# Altium PCB PCB1.PcbDoc
Units mm, origin at the board's own origin, x right, y up, seen from the top; angles counter-clockwise.
Board outline 40 x 50 mm, 4 copper layers (TopLayer1, MidLayer2, Ground Plane, BottomLayer4), stack 1.58 mm thick; 97 components, 38 nets, 264 pads, 122 vias.
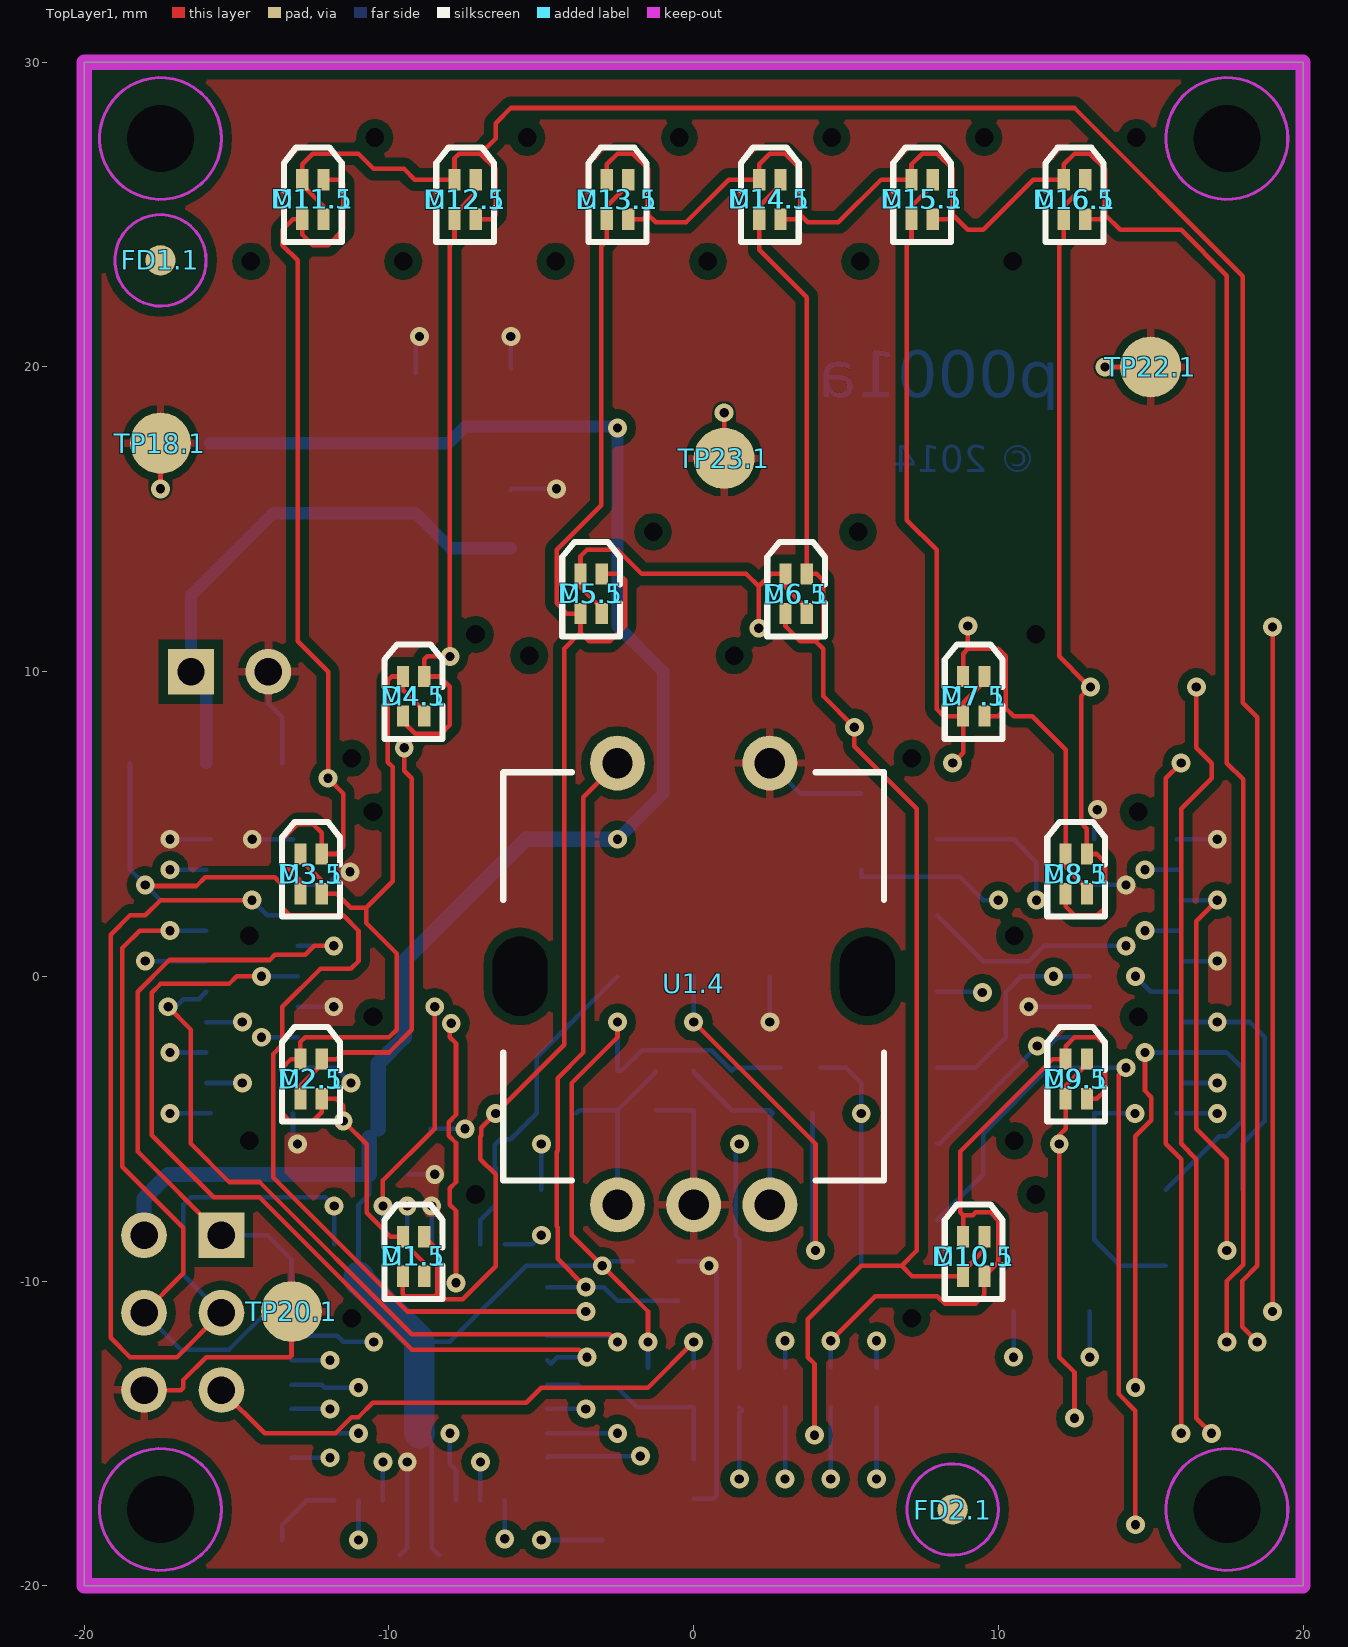
[diagram p0: TopLayer1 view]
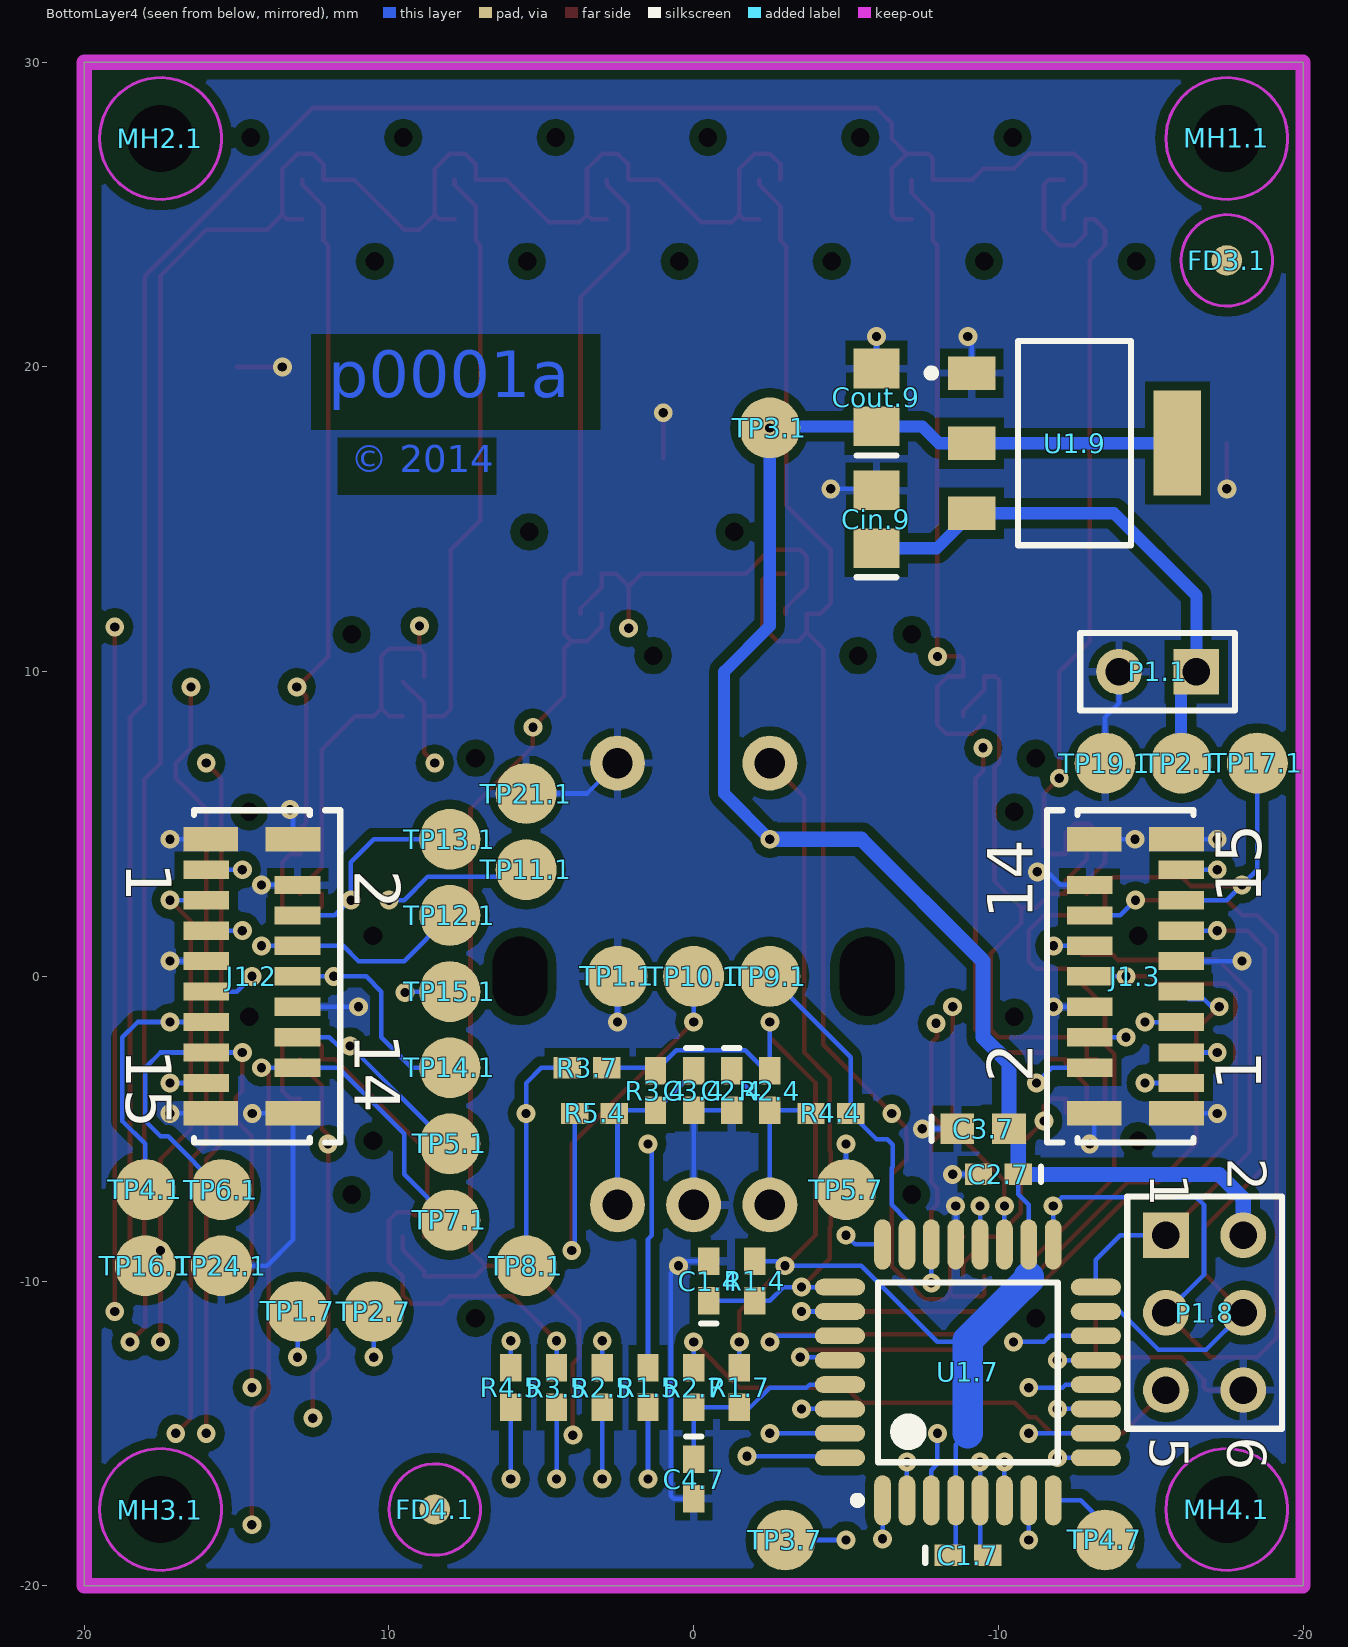
[diagram p1: BottomLayer4 view, seen from below]
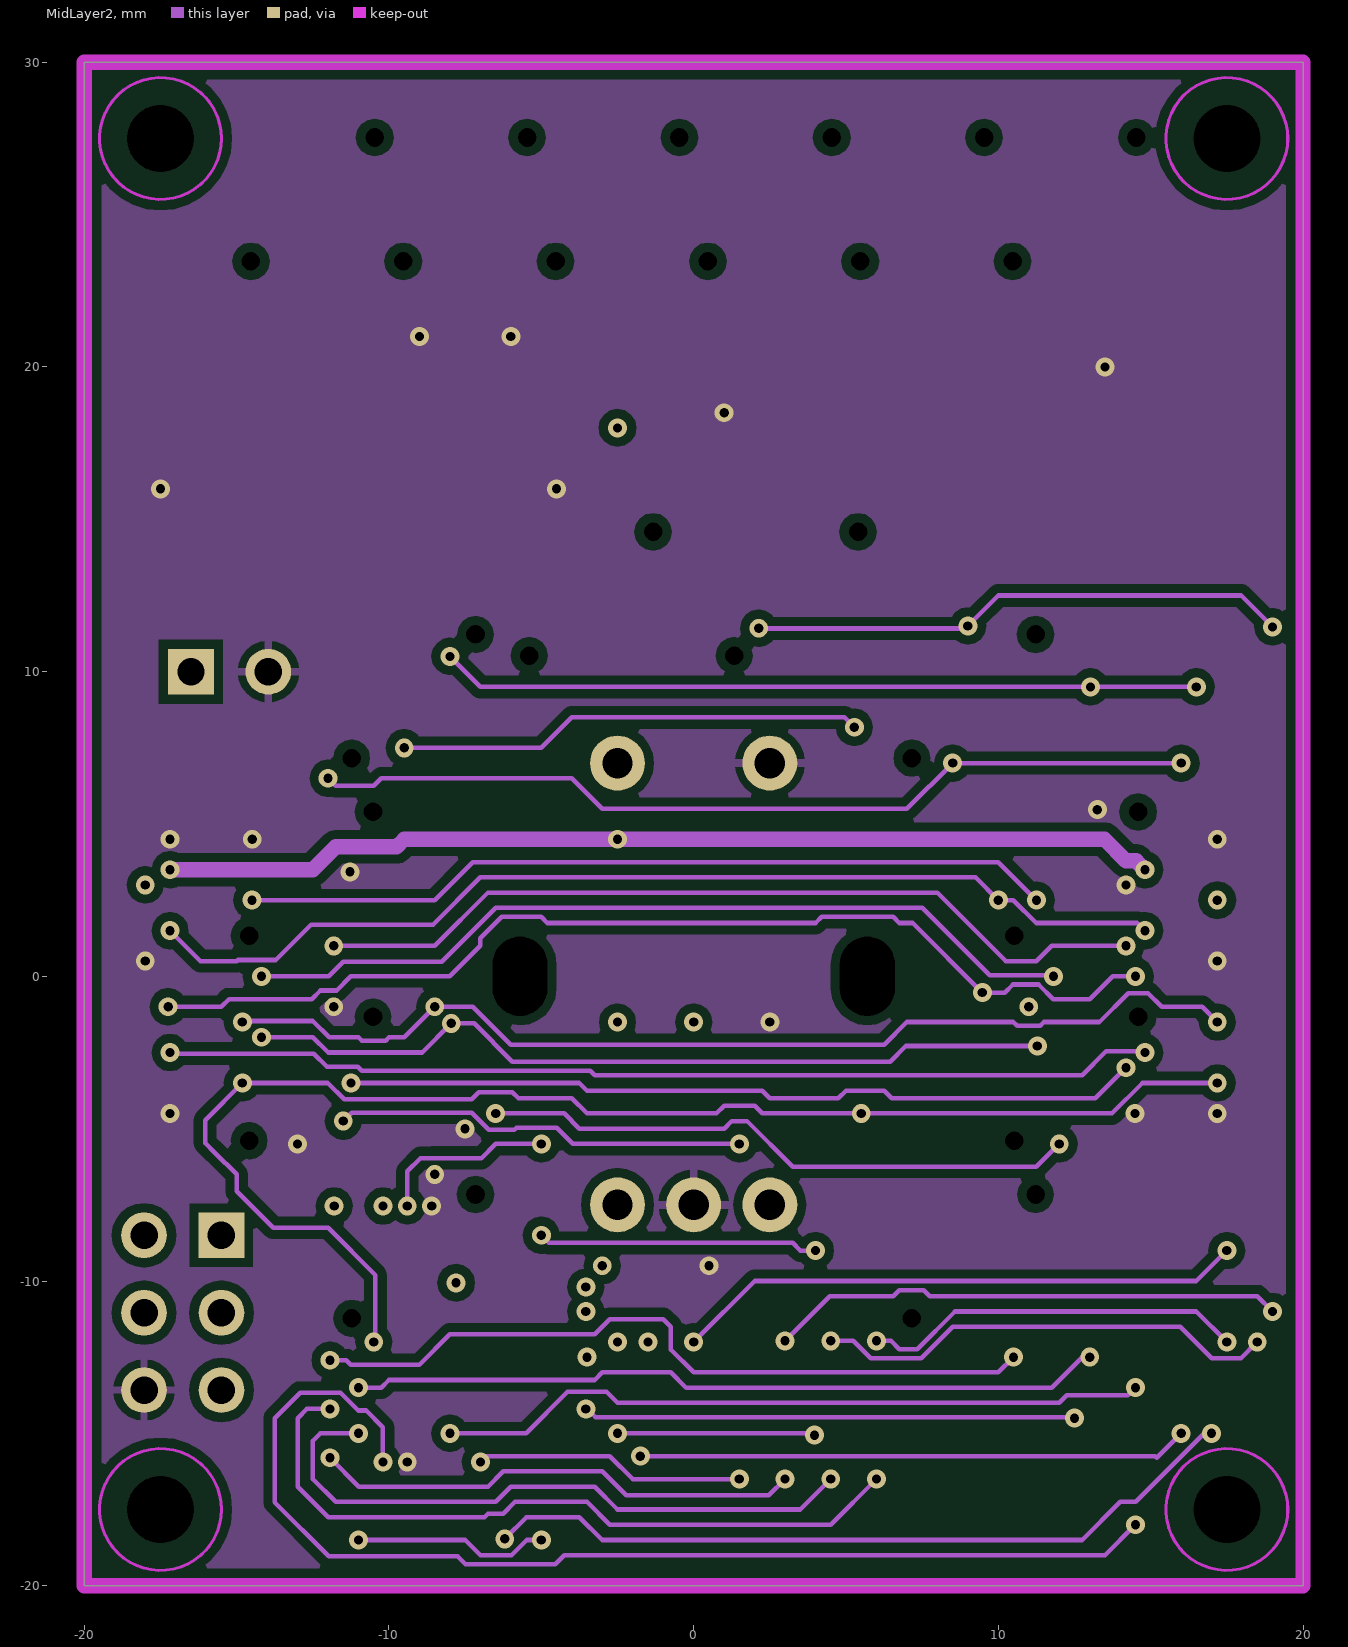
[diagram p2: MidLayer2]
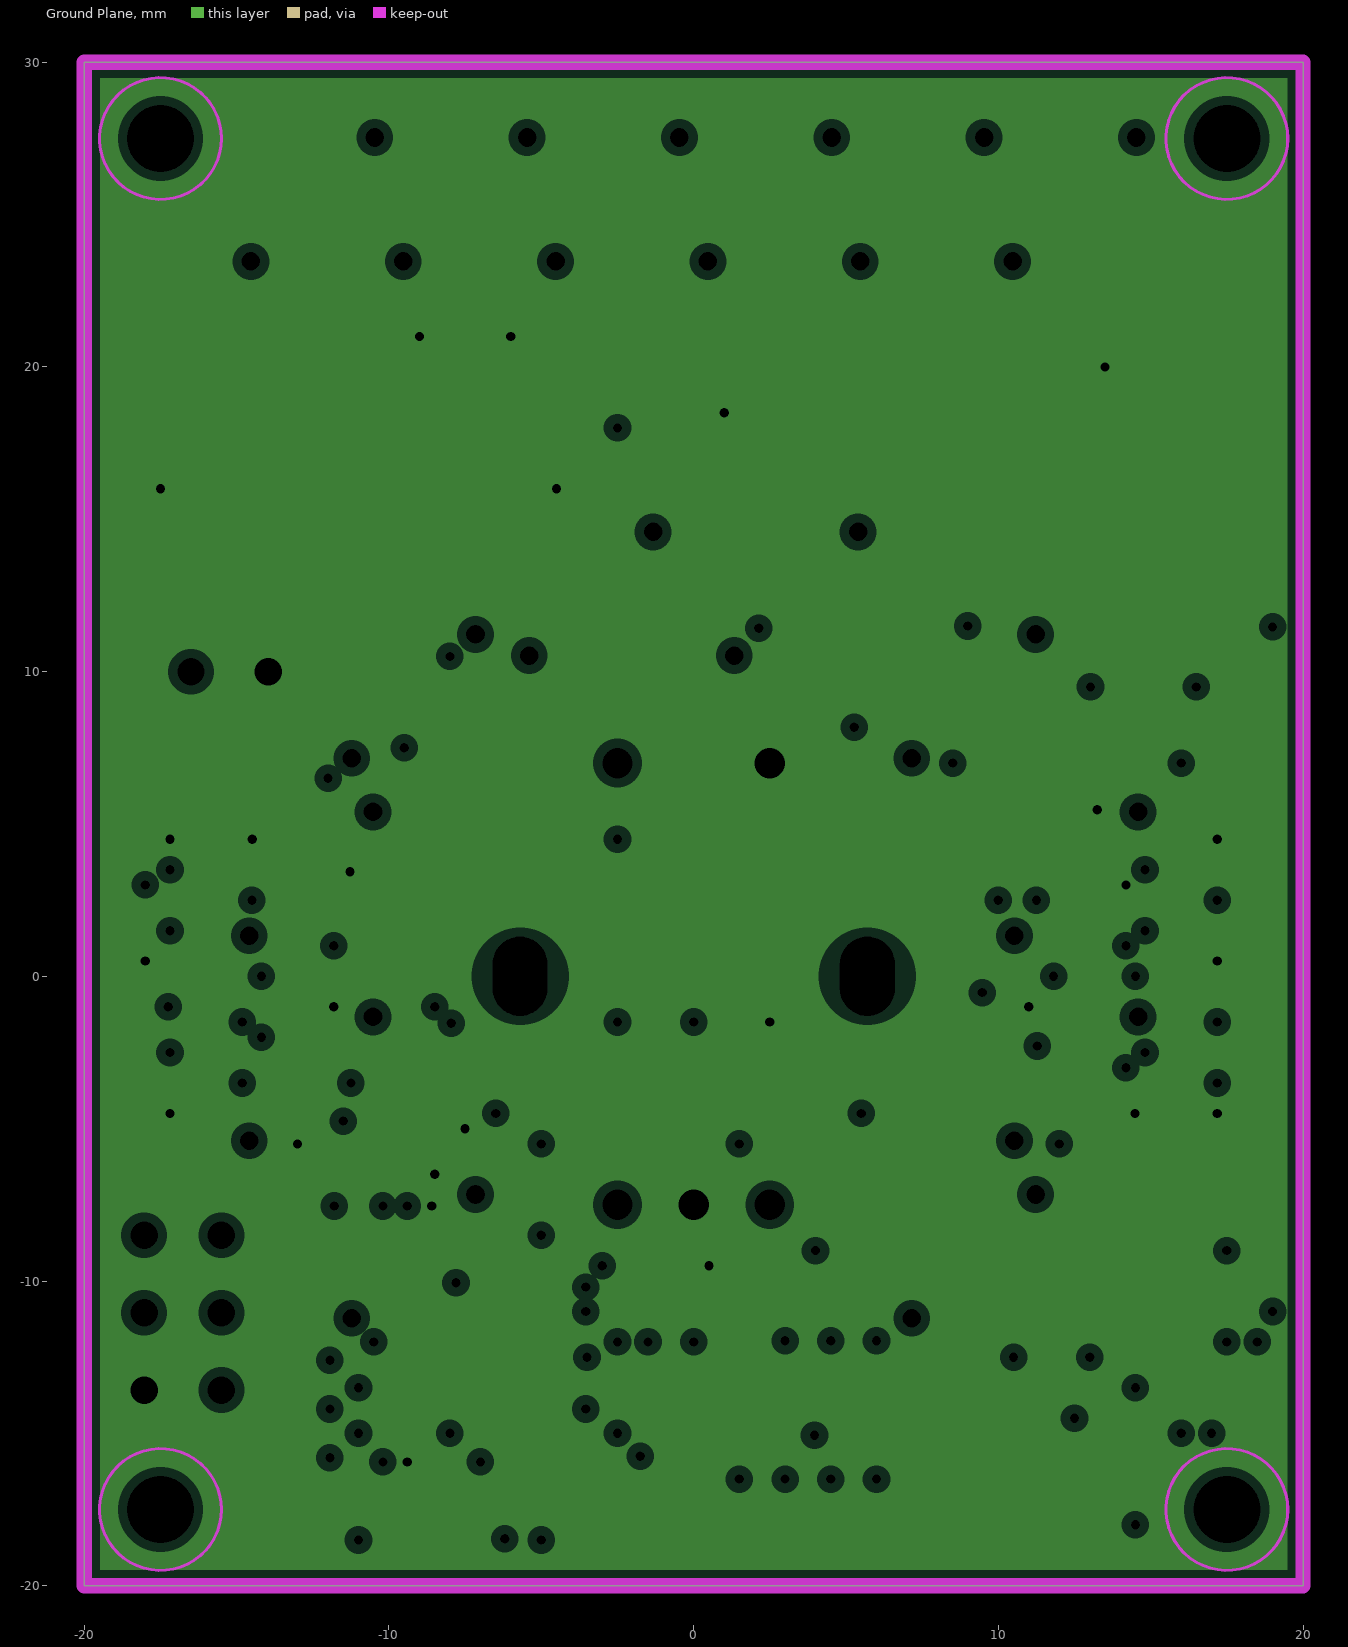
[diagram p3: Ground Plane, clearances drawn from the general rule]

## Layer stack, top to bottom
Top Solder: solder mask 0.01, Solder Resist, Dk 3.5
TopLayer1: signal copper 0.07
Dielectric 1: core 0.12, FR-4, Dk 4.8
MidLayer2: signal copper 0.035
Dielectric 3: core 1.13, FR-4, Dk 4.2
Ground Plane: plane copper 0.035, net GND
Dielectric 4: prepreg 0.12, FR-4, Dk 4.2
BottomLayer4: signal copper 0.07
Bottom Solder: solder mask 0.01, Solder Resist, Dk 3.5

## Board outline
-20,-20 -20,30 20,30 20,-20

## Design rules (kind name [scope] priority, off if disabled: settings)
Clearance ClearancePoly [InPolygon] p1: gap=0.3
Clearance Clearance_NPT_Outer [InPadClass('NPT') vs OnTopLayer Or OnBottomLayer] p2: gap=0.26
Clearance Clearance_NPT_Inner [InPadClass('NPT') vs OnMid] p3: gap=0.4
Clearance [All] p4: gap=0.15
HoleSize [All] p1: absolutevalues=TRUE maxlimit=6.3 minlimit=0.305 maxpercent=80.000 minpercent=20.000
HoleToHoleClearance HoleToHoleClearance_Gnd [InNet('GND')] p1: gap=0.453 allowstackedmicrovias=FALSE
HoleToHoleClearance [All] p2: gap=0.254 allowstackedmicrovias=TRUE
MinimumAnnularRing [All] p1: minimumring=0.153
MinimumSolderMaskSliver [All] p1: minsoldermaskwidth=0.089
PlaneClearance [All] p1: clearance=0.3
PlaneConnect [All] p1: planeconnectstyle=Direct reliefexpansion=0.508 reliefentries=4 reliefconductorwidth=0.254 reliefairgap=0.254
PolygonConnect PolygonConnect_PourOver [InPadClass('DirectConnectPads')] p1: connectstyle=Direct reliefconductorwidth=0.254 reliefentries=4 polygonreliefangle="90 Angle" airgapwidth=0.254
PolygonConnect PolygonConnect_Via [IsVia] p2: connectstyle=Direct reliefconductorwidth=0.254 reliefentries=4 polygonreliefangle="90 Angle" airgapwidth=0.254
PolygonConnect [All] p3: connectstyle=Relief reliefconductorwidth=0.254 reliefentries=4 polygonreliefangle="90 Angle" airgapwidth=0.254
RoutingVias [All] p1: holewidth=0.305 width=0.62 viastyle="Through Hole" minholewidth=0.305 minwidth=0.62 maxholewidth=0.305 maxwidth=0.62
SilkToBoardRegionClearance [All] p1 off:
SilkToSilkClearance [All] p1: silktosilkclearance=0
SilkToSolderMaskClearance [IsPad] p1: minsilkscreentomaskgap=0 clearancetoexposedcopper=TRUE
SolderMaskExpansion SolderMaskExpansion_Via [IsVia] p1: expansion=-1
SolderMaskExpansion [All] p2: expansion=0.076
UnpouredPolygon [All] p1: allowunpoured=FALSE
ViasUnderSMD [All] p1: allowed=FALSE
Width [All] p1: maxlimit=1 minlimit=0.15 preferedwidth=0.15 minimp=50.000000 maximp=50.000000 favimp=50.000000
21 further rules are at their usual default settings.

## Classes and differential pairs
pad class NPT: M1.1- M2.1- M3.1- M4.1- M5.1- M6.1- M7.1- M8.1- M9.1- M10.1- M11.1- M12.1- M13.1- M14.1- M15.1- M16.1- MH1.1- MH2.1- MH3.1- MH4.1- U1.4-
net class U_encoder_Nets: NetC2.4_1 NetC3.4_1
net class U_micro_avr_tiny_48_88_tqfp32_Nets: NetC4.7_1 NetTP1.7_1 NetTP2.7_1 NetTP3.7_1 NetTP4.7_1 NetTP5.7_1
net class U_leds_Nets: ROW0 ROW1 ROW2 ROW3
net class spi: SPI.MISO SPI.MOSI SPI.SCLK
net class leds: LEDS.COL0 LEDS.COL1 LEDS.COL2 LEDS.COL3 LEDS.ROW0 LEDS.ROW1 LEDS.ROW2 LEDS.ROW3
net class LEDS.ROW[0..3]: LEDS.ROW0 LEDS.ROW1 LEDS.ROW2 LEDS.ROW3
net class LEDS.COL[0..3]: LEDS.COL0 LEDS.COL1 LEDS.COL2 LEDS.COL3
net class i2c: I2C.SCL I2C.SDA
net class encoder: ENCODER.A ENCODER.B
component class U_power_ldo_fixed_sot223: Cin.9 Cout.9 U1.9
component class U_micro_avr_tiny_48_88_tqfp32: C1.7 C2.7 C3.7 C4.7 R1.7 R2.7 R3.7 TP1.7 TP2.7 TP3.7 TP4.7 TP5.7 U1.7
component class U_micro_avr_prog_header_3x2: P1.8
component class U_leds: D1.5 D2.5 D3.5 D4.5 D5.5 D6.5 D7.5 D8.5 D9.5 D10.5 D11.5 D12.5 D13.5 D14.5 D15.5 D16.5 R1.5 R2.5 R3.5 R4.5
component class U_encoder: C1.4 C2.4 C3.4 R1.4 R2.4 R3.4 R4.4 R5.4 U1.4
component class U_conn_rotary_control_out: J1.3
component class U_conn_rotary_control_in: J1.2
component class top: FD1.1 FD2.1 FD3.1 FD4.1 M1.1 M2.1 M3.1 M4.1 M5.1 M6.1 M7.1 M8.1 M9.1 M10.1 M11.1 M12.1 M13.1 M14.1 M15.1 M16.1 MH1.1 MH2.1 MH3.1 MH4.1 P1.1 TP1.1 TP2.1 TP3.1 TP4.1 TP5.1 TP6.1 TP7.1 TP8.1 TP9.1 TP10.1 TP11.1 TP12.1 TP13.1 TP14.1 TP15.1 TP16.1 TP17.1 TP18.1 TP19.1 TP20.1 TP21.1 TP22.1 TP23.1 TP24.1
pad class DirectConnectPads: J1.2-16 J1.2-17 J1.2-18 J1.2-19 J1.3-16 J1.3-17 J1.3-18 J1.3-19

## Components (designator, comment, footprint, x,y, rotation, side; value= is the part's Value field where it differs from the comment)
C1.4 "C0402" 0402 -0.5,-10 r90 bottom (schematic designator C1)
C1.7 "C0402" 0402 -9,-19 r180 bottom (schematic designator C1)
C2.4 "C0402" 0402 -1.25,-3.75 r270 bottom (schematic designator C2)
C2.7 "C0402" 0402 -10,-6.5 r0 bottom (schematic designator C2)
C3.4 "C0402" 0402 0,-3.75 r270 bottom (schematic designator C3)
C3.7 "C0603" 0603 -9.5,-5 r180 bottom (schematic designator C3)
C4.7 "C0402" 0402 0,-16.5 r270 bottom (schematic designator C4)
Cin.9 "C0805" 0805 -6,15 r90 bottom (schematic designator Cin)
Cout.9 "C0805" 0805 -6,19 r90 bottom (schematic designator Cout)
D1.5 "HSMF-C165" 1.6X0.8X0.5 -9.192,-9.192 r90 top locked (schematic designator D1)
D2.5 "HSMF-C165" 1.6X0.8X0.5 -12.557,-3.365 r90 top locked (schematic designator D2)
D3.5 "HSMF-C165" 1.6X0.8X0.5 -12.557,3.365 r90 top locked (schematic designator D3)
D4.5 "HSMF-C165" 1.6X0.8X0.5 -9.192,9.192 r90 top locked (schematic designator D4)
D5.5 "HSMF-C165" 1.6X0.8X0.5 -3.365,12.557 r90 top locked (schematic designator D5)
D6.5 "HSMF-C165" 1.6X0.8X0.5 3.365,12.557 r90 top locked (schematic designator D6)
D7.5 "HSMF-C165" 1.6X0.8X0.5 9.192,9.192 r90 top locked (schematic designator D7)
D8.5 "HSMF-C165" 1.6X0.8X0.5 12.557,3.365 r90 top locked (schematic designator D8)
D9.5 "HSMF-C165" 1.6X0.8X0.5 12.557,-3.365 r90 top locked (schematic designator D9)
D10.5 "HSMF-C165" 1.6X0.8X0.5 9.192,-9.192 r90 top locked (schematic designator D10)
D11.5 "HSMF-C165" 1.6X0.8X0.5 -12.5,25.5 r90 top locked (schematic designator D11)
D12.5 "HSMF-C165" 1.6X0.8X0.5 -7.5,25.5 r90 top locked (schematic designator D12)
D13.5 "HSMF-C165" 1.6X0.8X0.5 -2.5,25.5 r90 top locked (schematic designator D13)
D14.5 "HSMF-C165" 1.6X0.8X0.5 2.5,25.5 r90 top locked (schematic designator D14)
D15.5 "HSMF-C165" 1.6X0.8X0.5 7.5,25.5 r90 top locked (schematic designator D15)
D16.5 "HSMF-C165" 1.6X0.8X0.5 12.5,25.5 r90 top locked (schematic designator D16)
FD1.1 "Component_1" PCBComponent_1#1 -17.5,23.5 r90 top (schematic designator FD1)
FD2.1 "Component_1" PCBComponent_1#1 8.5,-17.5 r90 top (schematic designator FD2)
FD3.1 "Component_1" PCBComponent_1#1 -17.5,23.5 r90 bottom (schematic designator FD3)
FD4.1 "Component_1" PCBComponent_1#1 8.5,-17.5 r90 bottom (schematic designator FD4)
J1.2 "CL586-0561-5" FH12-15S-0.5SV 14.5,0 r270 bottom locked (schematic designator J1)
J1.3 "CL586-0561-5" FH12-15S-0.5SV -14.5,0 r90 bottom locked (schematic designator J1)
M1.1 "Component_1" PCBComponent_1#2 -9.192,-9.192 r0 top locked (schematic designator M1)
M2.1 "Component_1" PCBComponent_1#2 -12.557,-3.365 r0 top locked (schematic designator M2)
M3.1 "Component_1" PCBComponent_1#2 -12.557,3.365 r0 top locked (schematic designator M3)
M4.1 "Component_1" PCBComponent_1#2 -9.192,9.192 r0 top locked (schematic designator M4)
M5.1 "Component_1" PCBComponent_1#2 -3.365,12.557 r0 top locked (schematic designator M5)
M6.1 "Component_1" PCBComponent_1#2 3.365,12.557 r0 top locked (schematic designator M6)
M7.1 "Component_1" PCBComponent_1#2 9.192,9.192 r0 top locked (schematic designator M7)
M8.1 "Component_1" PCBComponent_1#2 12.557,3.365 r0 top locked (schematic designator M8)
M9.1 "Component_1" PCBComponent_1#2 12.557,-3.365 r0 top locked (schematic designator M9)
M10.1 "Component_1" PCBComponent_1#2 9.192,-9.192 r0 top locked (schematic designator M10)
M11.1 "Component_1" PCBComponent_1#2 -12.5,25.5 r0 top locked (schematic designator M11)
M12.1 "Component_1" PCBComponent_1#2 -7.5,25.5 r0 top locked (schematic designator M12)
M13.1 "Component_1" PCBComponent_1#2 -2.5,25.5 r0 top locked (schematic designator M13)
M14.1 "Component_1" PCBComponent_1#2 2.5,25.5 r0 top locked (schematic designator M14)
M15.1 "Component_1" PCBComponent_1#2 7.5,25.5 r0 top locked (schematic designator M15)
M16.1 "Component_1" PCBComponent_1#2 12.5,25.5 r0 top locked (schematic designator M16)
MH1.1 "Component_1" PCBComponent_1#3 -17.5,27.5 r180 bottom (schematic designator MH1)
MH2.1 "Component_1" PCBComponent_1#3 17.5,27.5 r90 bottom (schematic designator MH2)
MH3.1 "Component_1" PCBComponent_1#3 17.5,-17.5 r90 bottom (schematic designator MH3)
MH4.1 "Component_1" PCBComponent_1#3 -17.5,-17.5 r90 bottom (schematic designator MH4)
P1.1 "Header 2" HDR1X2 -16.5,10 r0 bottom (schematic designator P1)
P1.8 "Header 3X2" HDR2X3 -15.5,-8.5 r270 bottom (schematic designator P1)
R1.4 "ERJ2RB" 2-0402 -2,-10 r90 bottom (schematic designator R1)
R1.5 "ERJ2RB" 2-0402 1.5,-13.5 r90 bottom (schematic designator R1)
R1.7 "ERJ2RB" 2-0402 -1.5,-13.5 r90 bottom (schematic designator R1)
R2.4 "ERJ2RB" 2-0402 -2.5,-3.75 r90 bottom (schematic designator R2)
R2.5 "ERJ2RB" 2-0402 3,-13.5 r90 bottom (schematic designator R2)
R2.7 "ERJ2RB" 2-0402 0,-13.5 r90 bottom (schematic designator R2)
R3.4 "ERJ2RB" 2-0402 1.25,-3.75 r90 bottom (schematic designator R3)
R3.5 "ERJ2RB" 2-0402 4.5,-13.5 r90 bottom (schematic designator R3)
R3.7 "ERJ2RB" 2-0402 3.5,-3 r180 bottom (schematic designator R3)
R4.4 "ERJ2RB" 2-0402 -4.5,-4.5 r0 bottom (schematic designator R4)
R4.5 "ERJ2RB" 2-0402 6,-13.5 r90 bottom (schematic designator R4)
R5.4 "ERJ2RB" 2-0402 3.25,-4.5 r180 bottom (schematic designator R5)
TP1.1 "Component_1" PCBComponent_1#4 2.5,0 r90 bottom (schematic designator TP1)
TP1.7 "Component_1" PCBComponent_1#4 13,-11 r90 bottom (schematic designator TP1)
TP2.1 "Component_1" PCBComponent_1#4 -16,7 r90 bottom (schematic designator TP2)
TP2.7 "Component_1" PCBComponent_1#4 10.5,-11 r90 bottom (schematic designator TP2)
TP3.1 "Component_1" PCBComponent_1#4 -2.5,18 r90 bottom (schematic designator TP3)
TP3.7 "Component_1" PCBComponent_1#4 -3,-18.5 r90 bottom (schematic designator TP3)
TP4.1 "Component_1" PCBComponent_1#4 18,-7 r90 bottom (schematic designator TP4)
TP4.7 "Component_1" PCBComponent_1#4 -13.5,-18.5 r90 bottom (schematic designator TP4)
TP5.1 "Component_1" PCBComponent_1#4 8,-5.5 r90 bottom (schematic designator TP5)
TP5.7 "Component_1" PCBComponent_1#4 -5,-7 r90 bottom (schematic designator TP5)
TP6.1 "Component_1" PCBComponent_1#4 15.5,-7 r90 bottom (schematic designator TP6)
TP7.1 "Component_1" PCBComponent_1#4 8,-8 r90 bottom (schematic designator TP7)
TP8.1 "Component_1" PCBComponent_1#4 5.5,-9.5 r90 bottom (schematic designator TP8)
TP9.1 "Component_1" PCBComponent_1#4 -2.5,0 r90 bottom (schematic designator TP9)
TP10.1 "Component_1" PCBComponent_1#4 0,0 r90 bottom (schematic designator TP10)
TP11.1 "Component_1" PCBComponent_1#4 5.5,3.5 r90 bottom (schematic designator TP11)
TP12.1 "Component_1" PCBComponent_1#4 8,2 r90 bottom (schematic designator TP12)
TP13.1 "Component_1" PCBComponent_1#4 8,4.5 r90 bottom (schematic designator TP13)
TP14.1 "Component_1" PCBComponent_1#4 8,-3 r90 bottom (schematic designator TP14)
TP15.1 "Component_1" PCBComponent_1#4 8,-0.5 r90 bottom (schematic designator TP15)
TP16.1 "Component_1" PCBComponent_1#4 18,-9.5 r90 bottom (schematic designator TP16)
TP17.1 "Component_1" PCBComponent_1#4 -18.5,7 r90 bottom (schematic designator TP17)
TP18.1 "Component_1" PCBComponent_1#4 -17.5,17.5 r90 top (schematic designator TP18)
TP19.1 "Component_1" PCBComponent_1#4 -13.5,7 r90 bottom (schematic designator TP19)
TP20.1 "Component_1" PCBComponent_1#4 -13.2,-11 r90 top (schematic designator TP20)
TP21.1 "Component_1" PCBComponent_1#4 5.5,6 r90 bottom (schematic designator TP21)
TP22.1 "Component_1" PCBComponent_1#4 15,20 r90 top (schematic designator TP22)
TP23.1 "Component_1" PCBComponent_1#4 1,17 r90 top (schematic designator TP23)
TP24.1 "Component_1" PCBComponent_1#4 15.5,-9.5 r90 bottom (schematic designator TP24)
U1.4 "PEC11R-4215F-S0024" PCBComponent_1#5 0,0 r0 top locked (schematic designator U1)
U1.7 "ATtiny88-AUR" 32A_N -9,-13 r90 bottom locked (schematic designator U1)
U1.9 "REG1117-3.3" ZZ311 -12.5,17.5 r270 bottom (schematic designator U1)

## Footprints (in the part's own frame and the unit in brackets; to place one, negate y for a bottom-side part, rotate by r counter-clockwise, add the part's x,y. Pads: shape width x height; smd on the part's side, far side on the other; paste and mask are expansions set on the pad)
1.6X0.8X0.5 [mm] "SM LED, Bi-Colour; 4 Flat Leads; Body 1.6 x 0.8 x 0.5 mm (LxWxH)"
  rect 0.7x0.4 smd: 1(-0.65,0.35) 2(-0.65,-0.35) 3(0.65,0.35) 4(0.65,-0.35)
  silkscreen extent -1.4,-0.95 1.7,0.95
2-0402 [mm] "Chip Resistor; Body 1 x 0.5 mm (LxW typ)"
  rect 0.9x0.7 smd: 1(-0.65,0) 2(0.65,0)
32A_N [mm] "Thin QFP, 32-Leads, Body 7x7mm, Pitch 0.8mm, IPC Medium Density"
  oval 1.65x0.55 smd: 1(-4.2,2.8) 2(-4.2,2) 3(-4.2,1.2) 4(-4.2,0.4) 5(-4.2,-0.4) 6(-4.2,-1.2) 7(-4.2,-2) 8(-4.2,-2.8) 17(4.2,-2.8) 18(4.2,-2) 19(4.2,-1.2) 20(4.2,-0.4) 21(4.2,0.4) 22(4.2,1.2) 23(4.2,2) 24(4.2,2.8)
  oval 0.55x1.65 smd: 9(-2.8,-4.2) 10(-2,-4.2) 11(-1.2,-4.2) 12(-0.4,-4.2) 13(0.4,-4.2) 14(1.2,-4.2) 15(2,-4.2) 16(2.8,-4.2) 25(2.8,4.2) 26(2,4.2) 27(1.2,4.2) 28(0.4,4.2) 29(-0.4,4.2) 30(-1.2,4.2) 31(-2,4.2) 32(-2.8,4.2)
  silkscreen extent -4.32,-2.95 2.95,3.75, body extent -3.5,-3.5 3.5,3.5, height 1.2
0402 [mm] "Chip Capacitor; Body 1.0 x 0.5 mm (LxW typ)"
  rect 0.9x0.7 smd: 1(-0.65,0) 2(0.65,0)
  silkscreen extent -1.4,-0.25 -1.4,0.25
0603 [mm] "Chip Capacitor; Body 1.6 x 0.8 mm (LxW typ)"
  rect 1.1x1 smd: 1(-0.85,0) 2(0.85,0)
  silkscreen extent -1.7,-0.4 -1.7,0.4
0805 [mm] "Chip Capacitor; Body 2.0 x 1.2 mm (LxW typ)"
  rect 1.3x1.5 smd: 1(-0.95,0) 2(0.95,0)
  silkscreen extent -1.9,-0.65 -1.9,0.65
FH12-15S-0.5SV [mm] "Connector; FH12 Series; 15 Position; 0.5mm Spaced Vertical Mounting"
  rect 0.6x1.5 smd: 1(-3.5,-1.5) 2(-3,1.5) 3(-2.5,-1.5) 4(-2,1.5) 5(-1.5,-1.5) 6(-1,1.5) 7(-0.5,-1.5) 8(0,1.5) 9(0.5,-1.5) 10(1,1.5) 11(1.5,-1.5) 12(2,1.5) 13(2.5,-1.5) 14(3,1.5) 15(3.5,-1.5)
  rect 0.8x1.8 smd: 16(-4.5,-1.35) 17(-4.5,1.35) 18(4.5,-1.35) 19(4.5,1.35)
  silkscreen extent -5.45,-1.9 5.45,2.9
HDR1X2 [mm] "Connector; Header; 2 Position"
  rect 1.5x1.5 hole 0.9: 1(0,0)
  round 1.5 hole 0.9: 2(2.54,0)
  silkscreen extent -1.27,-1.27 3.81,1.27
HDR2X3 [mm] "Connector; Header; 3x2 Position"
  rect 1.5x1.5 hole 0.9: 1(0,0)
  round 1.5 hole 0.9: 2(0,2.54) 3(2.54,0) 4(2.54,2.54) 5(5.08,0) 6(5.08,2.54)
  silkscreen extent -1.27,-1.27 6.35,3.81
PCBComponent_1#1 [mm]
  round 1 smd paste-1 mask+1: ""(0,0)
  TopLayer1 keep-out circle w0.1: c0,0 r1.5
PCBComponent_1#2 [mm] "VLP-XXX-X"
  round 0 hole 0.61 unplated mask+0.381: ""(-2.032,-2.032) ""(2.032,2.032)
PCBComponent_1#3 [mm]
  round 0 hole 2.2 unplated mask+0.762: ""(0,0)
  Keep-Out Layer circle w0.1: c0,0 r2
PCBComponent_1#4 [mm]
  round 2 smd paste-1: 1(0,0)
PCBComponent_1#5 [mm]
  round 1.8 hole 1: 1(-2.5,7) 2(2.5,7) A(-2.5,-7.5) B(2.5,-7.5) C(0,-7.5)
  rect 0x0 hole 1.8 slot 2.6 at 90 deg unplated: ""(-5.7,0) ""(5.7,0)
  silkscreen extent -6.25,-6.7 6.25,6.7
ZZ311 [mm] "SOT-223/SC-73; 4 Leads; Body 6.7 x 7.3 mm, inc. leads (LxW max)"
  rect 1.1x1.55 smd: 1(-2.3,-3.375) 2(0,-3.375) 3(2.3,-3.375)
  rect 3.45x1.55 smd: 4(0,3.375)
  silkscreen extent -3.35,-4.83 3.35,1.85

## Part data
C1.4 C1.7 C2.4 C2.7 C3.4 C3.7 C4.7 Cin.9 Cout.9: "Ceramic Chip Capacitor - Standard"
D1.5 D2.5 D3.5 D4.5 D5.5 D6.5 D7.5 D8.5 D9.5 D10.5 D11.5 D12.5 D13.5 D14.5 D15.5 D16.5: "Miniature Bi-Colour Surface Mount Chip LED (Red/Green)"
J1.2 J1.3: "FH12 Series, \"Flip-Lock\" SMT/ZIF FFC/FPC Connector - 0.5mm Spaced Vertical Mounting"
M1.1 M2.1 M3.1 M4.1 M5.1 M6.1 M7.1 M8.1 M9.1 M10.1 M11.1 M12.1 M13.1 M14.1 M15.1 M16.1: "Light Pipe Vertical"
P1.1: "Header, 2-Pin"
P1.8: "Header, 3-Pin, Dual row"
R1.4 R1.5 R1.7 R2.4 R2.5 R2.7 R3.4 R3.5 R3.7 R4.4 R4.5 R5.4: "Precision Thick Film Chip Resistor, 10 Ohm to 1M Ohm Range, 1% and 0.5% Tolerance, 0402 Size, 0.063 W"
U1.4: library part Component_1, "PEC11R-4xxxF-Sxxxx"
U1.7: "8-bit AVR Microcontroller, 1.8-5.5V, 12MHz, 8KB Flash, 64 Bytes EEPROM, 512 Bytes SRAM, 32-pin TQFP, Industrial Grade (-40°C to 85°C), Pb-Free, Reel"
U1.9: "800mA and 1A Low Dropout Positive Regulator 2.85V, 3.3V, 5V, and Adjustable"

## Via types
v1: diameter 0.62, hole 0.305, TopLayer1 to BottomLayer4, 122 vias

## Nets (pads, with @x,y where several pads share a name; then routed paths per layer and width w, separated by ;. In a path a pad name is that pad's centre, name@x,y a point inside that pad or via, vN(x,y) a via of type N, cw(c..) or ccw(c..) an arc to the next point about the centre after c; other vN are vias at no path point)
ENCODER.A: R4.4.1 TP9.1.1 U1.7.23 | length 10.9
  BottomLayer4 w0.15: U1.7.23 -7,-8 -6.5,-7.5 -6.5,-6.279 -6.53,-6.249 -6.53,-5.53 -6.35,-5.35 -6,-5.35 R4.4.1 -5.15,-2.65 TP9.1.1
ENCODER.B: R5.4.1 TP10.1.1 U1.7.24 | length 25.7
  TopLayer1 w0.15: v1(0,-1.5) 4,-5.5 v1(4,-9)
  MidLayer2 w0.15: v1(-5,-8.5) -4.75,-8.75 3.25,-8.75 3.5,-9 v1(4,-9)
  BottomLayer4 w0.15: U1.7.24 -5.3,-8.8 v1(-5,-8.5) ; v1(0,-1.5) TP10.1.1 ; R5.4.1 3.9,-8.9 v1(4,-9)
ENCODER_SWITCH: C1.4.1 R1.4.1 U1.4.1 U1.7.25 | length 22.9
  TopLayer1 w0.15: v1(-3.538,-10.2) -4.465,-9.273 -4.465,-8.243 -4.5,-8.208 -4.5,-5.757 -4.465,-5.722 -4.465,-3.34 -3.625,-2.5 -3.625,5.875 U1.4.1
  BottomLayer4 w0.15: U1.7.25 -3.805,-10.2 v1(-3.538,-10.2) -2.95,-10.2 -2.5,-10.65 R1.4.1 C1.4.1
GND: C1.4.2 C1.7.2 C2.4.2 C2.7.2 C3.4.2 C3.7.1 C4.7.2 Cin.9.2 Cout.9.2 J1.2.2 J1.2.7 J1.2.10 J1.2.16 J1.2.17 J1.2.18 J1.2.19 J1.3.6 J1.3.9 J1.3.14 J1.3.16 J1.3.17 J1.3.18 J1.3.19 P1.1.2 P1.8.6 TP1.1.1 TP18.1.1 TP19.1.1 TP20.1.1 TP21.1.1 TP22.1.1 TP23.1.1 TP24.1.1 U1.4.2 U1.4.C U1.7.5 U1.7.21 U1.9.1 | length 70
  TopLayer1 w0.15: P1.8.6 -16.83,-13.58 -16.75,-13.5 -16.75,-13.25 -16,-12.5 -13.25,-12.5 -13.2,-12.45 TP20.1.1 ; v1(-17.5,16) TP18.1.1 ; TP23.1.1 v1(1,18.5) ; v1(13.5,20) TP22.1.1
  BottomLayer4 w0.15: v1(-18,0.5) J1.3.9 ; v1(-17.187,-4.5) -16.92,-4.5 J1.3.16 ; v1(-17.187,4.5) -16.92,4.5 J1.3.18 ; v1(-14.487,4.5) -14.22,4.5 J1.3.19 ; P1.1.2 -13.96,8.96 -13.5,8.5 TP19.1.1 ; J1.3.17 -13.15,-5.35 v1(-13,-5.5) ; J1.3.6 v1(-11.813,-1) ; J1.3.14 -12.029,3 -11.6,3.429 v1(-11.281,3.429) ; C1.7.2 -9.4,-18.75 U1.7.5 -9.4,-16.205 v1(-9.4,-15.938) ; C2.7.2 v1(-8.5,-6.5) ; U1.9.1 -9.125,20.875 v1(-9,21) ; C3.7.1 -7.513,-5 v1(-7.507,-5.007) ; U1.7.21 v1(-8.6,-7.538) ; Cin.9.2 -5.95,16 v1(-4.5,16) ; Cout.9.2 v1(-6,21) ; C2.4.2 C3.4.2 U1.4.C ; C1.4.2 0.35,-9.35 v1(0.5,-9.5) 0.75,-9.75 0.75,-17.05 0.65,-17.15 C4.7.2 ; v1(2.5,-1.5) TP1.1.1 ; U1.4.2 3.5,6 TP21.1.1 ; v1(11,-1) 12.08,-1 J1.2.10 ; J1.2.2 v1(14.187,3) ; J1.2.17 13.15,5.37 v1(13.25,5.47) ; v1(14.487,-4.5) 14.22,-4.5 J1.2.19 13.15,-8.65 14,-9.5 TP24.1.1 ; J1.2.18 16.92,-4.5 v1(17.187,-4.5) ; J1.2.16 16.92,4.5 v1(17.187,4.5) ; J1.2.7 v1(17.187,0.5)
GPIO0: J1.2.11 J1.3.5 TP4.1.1 U1.7.19 | length 52.4
  TopLayer1 w0.15: v1(-10.2,-7.538) -10.2,-6.7 -8.5,-5 v1(-8.5,-1)
  MidLayer2 w0.15: v1(-14.813,-1.5) -14.778,-1.465 -12.5,-1.465 -11.965,-2 -11,-2 -10.888,-2.112 -10.112,-2.112 -10,-2 -9.5,-2 v1(-8.5,-1) -7.25,-1 -6,-2.25 6.25,-2.25 7,-1.5 10.495,-1.5 10.621,-1.626 11.374,-1.626 11.5,-1.5 13.319,-1.5 14.266,-0.553 14.912,-0.553 15.359,-1 16.687,-1 v1(17.187,-1.5)
  BottomLayer4 w0.15: J1.3.5 v1(-14.813,-1.5) ; U1.7.19 v1(-10.2,-7.538) ; J1.2.11 v1(17.187,-1.5) 18.25,-1.5 18.75,-2 18.75,-4.75 18,-5.5 TP4.1.1
GPIO1: J1.2.12 J1.3.4 TP5.1.1 U1.7.22 | length 44.7
  TopLayer1 w0.15: v1(-7.956,-1.544) -8,-1.589 -8,-2 -7.8,-2.2 -7.8,-4.543 -8.042,-4.785 -8.042,-5.228 -7.8,-5.47 -7.8,-6.75 -8,-6.95 -8,-7.5 -7.8,-7.7 v1(-7.8,-10.062)
  MidLayer2 w0.15: v1(-14.187,-2) -12.5,-2 -12,-2.5 -8.911,-2.5 v1(-7.956,-1.544) -7.206,-1.544 -5.95,-2.8 6.45,-2.8 6.964,-2.286 v1(11.281,-2.286)
  BottomLayer4 w0.15: v1(-14.187,-2) J1.3.4 ; v1(-7.8,-10.062) U1.7.22 ; TP5.1.1 8.067,-5.5 v1(11.281,-2.286) 11.672,-2.286 11.958,-2 J1.2.12
GPIO2: J1.2.13 J1.3.3 TP6.1.1 U1.7.3 | length 79.4
  TopLayer1 w0.15: v1(14.5,-13.5) 14.5,-5.244 15.022,-4.722 15.022,-3.965 14.813,-3.756 v1(14.813,-2.5)
  MidLayer2 w0.15: v1(-17.187,-2.5) -17.152,-2.535 -12.465,-2.535 -12.035,-2.965 -11.028,-2.965 -10.893,-3.1 -3.4,-3.1 -3.25,-3.25 12.75,-3.25 13.535,-2.465 14.778,-2.465 v1(14.813,-2.5) ; v1(-8,-15) -5.5,-15 -4.14,-13.64 -2.86,-13.64 -2.5,-14 12,-14 12.25,-13.75 14.25,-13.75 v1(14.5,-13.5)
  BottomLayer4 w0.15: v1(-17.187,-2.5) J1.3.3 ; v1(-8,-15) -8,-16.005 -7.8,-16.205 U1.7.3 ; v1(14.813,-2.5) J1.2.13 17.5,-2.5 18,-3 18,-4.75 17.5,-5.25 17.25,-5.25 TP6.1.1
GPIO3: J1.2.14 J1.3.2 TP7.1.1 U1.7.6 | length 91.8
  TopLayer1 w0.15: v1(14.187,-3) 13.952,-3.235 13.952,-13.709 14.5,-14.257 v1(14.5,-18)
  MidLayer2 w0.15: v1(-11.25,-3.5) -3.75,-3.5 -3.5,-3.75 2.25,-3.75 2.5,-4 4.75,-4 5,-3.75 6.25,-3.75 6.5,-4 13.187,-4 v1(14.187,-3) ; v1(-10.2,-15.938) -10.2,-14.8 -10.75,-14.25 -11.007,-14.25 -11.592,-13.665 -12.16,-13.665 -12.915,-13.665 -13.75,-14.5 -13.75,-17.269 -11.984,-19.035 -7.75,-19.035 -7.488,-19.297 -4.547,-19.297 -4.25,-19 13.5,-19 v1(14.5,-18)
  BottomLayer4 w0.15: J1.3.2 -11.75,-3 v1(-11.25,-3.5) ; U1.7.6 v1(-10.2,-15.938) ; TP7.1.1 9.5,-6.5 9.5,-5.162 11.662,-3 J1.2.14 v1(14.187,-3)
GPIO4: J1.2.15 J1.3.1 R3.7.1 TP8.1.1 U1.7.14 | length 58.3
  MidLayer2 w0.15: v1(-10.5,-12) -10.445,-11.945 -10.445,-9.805 -12,-8.25 -13.8,-8.25 -15,-7.05 -15,-6.5 -15.715,-5.785 -15.722,-5.785 -16.035,-5.472 -16.035,-4.722 v1(-14.813,-3.5) -12.007,-3.5 -11.472,-4.035 -7.285,-4.035 -7.05,-3.8 -5.95,-3.8 -5.75,-4 -4,-4 -3.5,-4.5 0.75,-4.5 1,-4.25 2,-4.25 2.25,-4.5 v1(5.5,-4.5) 13.73,-4.5 14.73,-3.5 v1(17.187,-3.5)
  BottomLayer4 w0.15: J1.3.1 v1(-14.813,-3.5) ; U1.7.14 -11.7,-11.8 -11.5,-12 v1(-10.5,-12) ; R3.7.1 5,-3 5.5,-3.5 v1(5.5,-4.5) TP8.1.1 ; J1.2.15 v1(17.187,-3.5)
I2C.SCL: J1.2.8 J1.3.8 TP14.1.1 U1.7.28 | length 63.4
  TopLayer1 w0.15: v1(-14.187,0) -15,0 -15.25,-0.25 -17.5,-0.25 -17.785,-0.535 -17.785,-5.215 -15.75,-7.25 -14.25,-7.25 -9.25,-12.25 -3.75,-12.25 v1(-3.5,-12.5)
  MidLayer2 w0.15: v1(-14.187,0) -11.977,0 -11.5,0.477 -8.273,0.477 -6.5,2.25 7.5,2.25 9.717,0.033 11.781,0.033 v1(11.813,0)
  BottomLayer4 w0.15: v1(-14.187,0) J1.3.8 ; U1.7.28 -4.688,-12.712 -4.476,-12.5 v1(-3.5,-12.5) ; TP14.1.1 9.25,-3 10.25,-2 10.25,-0.5 10.75,0 v1(11.813,0) J1.2.8
I2C.SDA: J1.2.9 J1.3.7 TP15.1.1 U1.7.27 | length 63.5
  TopLayer1 w0.15: v1(-17.25,-1) -16.5,-1.75 -16.5,-5.5 -15.25,-6.75 -14.25,-6.75 -9.25,-11.75 -2.75,-11.75 v1(-2.5,-12)
  MidLayer2 w0.15: v1(-17.25,-1) -15.5,-1 -15.25,-0.75 -12.535,-0.75 -12.25,-0.465 -11.715,-0.465 -11.25,0 -8,0 -7,1 -7,1.25 -6.3,1.95 -5,1.95 -4.8,1.75 4,1.75 4.2,1.95 6.55,1.95 6.75,1.75 7.191,1.75 v1(9.474,-0.533) 10.217,-0.533 10.483,-0.267 11.317,-0.267 11.8,-0.75 13,-0.75 13.75,0 v1(14.5,0)
  BottomLayer4 w0.15: v1(-17.25,-1) -17,-1 -16.75,-0.75 -16.25,-0.75 J1.3.7 ; U1.7.27 -2.7,-11.8 v1(-2.5,-12) ; TP15.1.1 9.441,-0.5 v1(9.474,-0.533) ; v1(14.5,0) 15,-0.5 J1.2.9
LEDS.COL0: D1.5.1 D1.5.4 D5.5.1 D5.5.4 D9.5.1 D9.5.4 D13.5.1 D13.5.4 U1.7.30 | length 98.8
  TopLayer1 w0.15: D1.5.1 -9.542,-10.435 -9.477,-10.5 -8.5,-10.5 -8.417,-10.417 ; D1.5.4 -8.417,-8.967 -8.417,-10.417 ; D5.5.4 -2.457,13.207 -2.25,13 -2.25,11.5 -2.75,11 -3.429,11 -3.715,11.285 ; D13.5.4 -2.15,25.982 -2.85,25.282 D13.5.1 -2.85,24.15 -3.035,23.965 -3.035,15.465 -4.5,14 -4.5,12.25 -4.157,11.907 D5.5.1 -3.715,11.285 ; v1(12.5,-14.5) 12.5,-13 12,-12.5 v1(12,-5.5) 12,-5.207 12.207,-5 D9.5.1 12.207,-3.583 12.907,-2.883 D9.5.4 ; -8.417,-10.417 -8.238,-10.597 -7.578,-10.597 -6.5,-9.519 -6.5,-6.5 -7,-6 -7,-5.257 -6.972,-5.228 -6.972,-4.972 v1(-6.5,-4.5) -4.25,-2.25 -4.25,10.75 -3.715,11.285
  MidLayer2 w0.15: v1(-6.5,-4.5) -4.25,-4.5 -3.75,-5 1,-5 1.25,-4.75 1.75,-4.75 3.25,-6.25 11.25,-6.25 v1(12,-5.5) ; v1(-3.538,-14.2) -3.513,-14.175 -3.223,-14.465 12.465,-14.465 v1(12.5,-14.5)
  BottomLayer4 w0.15: U1.7.30 v1(-3.538,-14.2)
LEDS.COL1: D2.5.1 D2.5.4 D6.5.1 D6.5.4 D10.5.1 D10.5.4 D14.5.1 D14.5.4 U1.7.31 | length 90.2
  TopLayer1 w0.15: D2.5.1 -12.907,-3.583 -12.207,-2.883 D2.5.4 -11.715,-2.715 -11.5,-2.5 -10,-2.5 -9.25,-1.75 -9.25,6.5 -9.5,6.75 v1(-9.5,7.5) ; D14.5.4 2.85,25.982 2.15,25.282 D14.5.1 2.15,23.85 3.715,22.285 D6.5.4 4.043,13.207 4.25,13 4.25,11.25 4,11 ; D6.5.1@3,11.892 D6.5.1 3.015,11.485 3.5,11 4,11 ; v1(3.965,-15.06) 3.965,-12.715 3.75,-12.5 3.75,-11.25 5.5,-9.5 6.825,-9.5 ; D10.5.4 9.542,-8.974 8.842,-9.674 D10.5.1 7.167,-9.842 6.825,-9.5 ; 4,11 4.25,10.75 4.25,9.2 v1(5.275,8.175) 5.275,7.55 7.325,5.5 7.325,-9 6.825,-9.5
  MidLayer2 w0.15: v1(-9.5,7.5) -5,7.5 -4,8.5 4.95,8.5 v1(5.275,8.175) ; v1(-2.5,-15) 3.905,-15 v1(3.965,-15.06)
  BottomLayer4 w0.15: U1.7.31 -3.805,-15 v1(-2.5,-15)
LEDS.COL2: D3.5.1 D3.5.4 D7.5.1 D7.5.4 D11.5.1 D11.5.4 D15.5.1 D15.5.4 U1.7.32 | length 126.5
  TopLayer1 w0.15: D3.5.1 -12.907,3.146 -13.5,3.739 -13.5,4.5 -13,5 -12.5,5 -12.207,4.707 D3.5.4 -11.735,4.015 -11.5,4.25 -11.5,6 v1(-12,6.5) -12,10 -13,11 -13,23.5 -13.5,24 -13.5,24.5 -13.15,24.85 D11.5.1 -12.85,24.35 -12.5,24 -12,24 -11.5,24.5 -11.5,26 -11.65,26.15 D11.5.4 ; D15.5.4 7.85,25.982 7.15,25.282 D15.5.1 7.15,24.15 7,24 7,14.975 7.975,14 7.975,8.775 8.208,8.542 D7.5.1 ; v1(8.5,7) 8.842,7.342 D7.5.1 ; D7.5.4@9.542,9.674 8.842,8.974 D7.5.1 ; v1(16,-15) 16,-6 15.5,-5.5 15.5,6.5 v1(16,7)
  MidLayer2 w0.15: v1(-12,6.5) -11.75,6.25 -10.5,6.25 -10.25,6.5 -4,6.5 -3,5.5 7,5.5 v1(8.5,7) v1(16,7) ; v1(-1.75,-15.75) 15.15,-15.75 15.2,-15.8 v1(16,-15)
  BottomLayer4 w0.15: U1.7.32 -4.75,-15.75 v1(-1.75,-15.75)
LEDS.COL3: D4.5.1 D4.5.4 D8.5.1 D8.5.4 D12.5.1 D12.5.4 D16.5.1 D16.5.4 U1.7.1 | length 126.6
  TopLayer1 w0.15: D4.5.1 -9.542,8.374 -9.136,7.967 ; -8.549,7.967 -9.136,7.967 ; D12.5.4 -7.15,25.718 -7.85,25.018 D12.5.1 -7.85,24.15 -8,24 v1(-8,10.5) -8.75,10.5 -8.842,10.408 D4.5.4 -8.342,9.842 -8,9.5 -8,8.25 -8.283,7.967 -9.136,7.967 ; D8.5.1 12.207,2.293 12.5,2 13.25,2 13.5,2.25 13.5,3.75 13.235,4.015 D8.5.4 12.907,4.843 12.715,5.035 12.715,9.19 v1(13.025,9.5) 13.025,9.625 12.875,9.625 12,10.5 12,24 12.15,24.15 D16.5.1 12.15,25.282 12.85,25.982 D16.5.4 ; v1(16.5,9.5) 16.5,7.5 17,7 17,6.5 16,5.5 16,-5.5 16.5,-6 16.5,-14.5 v1(17,-15)
  MidLayer2 w0.15: v1(-8,10.5) -7,9.5 v1(13.025,9.5) v1(16.5,9.5) ; v1(-6.2,-18.462) -5.488,-17.75 -3.75,-17.75 -3,-18.5 12.75,-18.5 14,-17.25 14.505,-17.25 16.22,-15.535 ; 16.221,-15.536 16.757,-15 v1(17,-15)
  BottomLayer4 w0.15: v1(-6.2,-18.462) U1.7.1
LEDS.ROW0: R1.5.1 U1.7.2 | length 12.6
  MidLayer2 w0.15: v1(-7,-15.938) -6.812,-15.75 -2.75,-15.75 -2,-16.5 v1(1.5,-16.5)
  BottomLayer4 w0.15: U1.7.2 v1(-7,-15.938) ; v1(1.5,-16.5) 1.5,-14.329 1.589,-14.239 R1.5.1
LEDS.ROW1: R2.5.1 U1.7.9 | length 19.7
  MidLayer2 w0.15: v1(-11.938,-15.8) -10.988,-16.75 -6.75,-16.75 -6.25,-16.25 -3,-16.25 -2.215,-17.035 2.465,-17.035 v1(3,-16.5)
  BottomLayer4 w0.15: U1.7.9 -12.205,-15.8 v1(-11.938,-15.8) ; v1(3,-16.5) R2.5.1
LEDS.ROW2: R3.5.1 U1.7.10 | length 25.6
  MidLayer2 w0.15: v1(-11,-15) -12.25,-15 -12.5,-15.25 -12.5,-16.5 -11.75,-17.25 -6.5,-17.25 -6,-16.75 -3.25,-16.75 -2.5,-17.5 3.5,-17.5 v1(4.5,-16.5)
  BottomLayer4 w0.15: U1.7.10 -12.205,-15 v1(-11,-15) ; v1(4.5,-16.5) R3.5.1
LEDS.ROW3: R4.5.1 U1.7.11 | length 27.6
  MidLayer2 w0.15: v1(-11.938,-14.2) -12.7,-14.2 -13,-14.5 -13,-16.75 -12,-17.75 -6.865,-17.75 -6.75,-17.635 -6.25,-17.635 -5.865,-17.25 -3.5,-17.25 -2.75,-18 4.5,-18 v1(6,-16.5)
  BottomLayer4 w0.15: U1.7.11 v1(-11.938,-14.2) ; v1(6,-16.5) R4.5.1
NetC2.4_1: C2.4.1 R2.4.1 R4.4.2 U1.4.A | length 6.3
  BottomLayer4 w0.15: R4.4.2 -3.75,-4.4 R2.4.1 ; U1.4.A R2.4.1 ; C2.4.1 -1.25,-3.15 R2.4.1
NetC3.4_1: C3.4.1 R3.4.1 R5.4.2 U1.4.B | length 6.3
  BottomLayer4 w0.15: C3.4.1 0,-3.15 R3.4.1 2.5,-4.4 R5.4.2 2.5,-4.6 U1.4.B
NetC4.7_1: C4.7.1 R1.7.1 R2.7.1 U1.7.29 | length 6.8
  BottomLayer4 w0.15: U1.7.29 -3.805,-13.4 -3.705,-13.5 -2.5,-13.5 -1.85,-14.15 R1.7.1 R2.7.1 C4.7.1
NetTP1.7_1: TP1.7.1 U1.7.12 | length 28.6
  MidLayer2 w0.15: v1(-11,-13.5) -10.25,-13.5 -10,-13.25 -3.25,-13.25 -3,-13 -0.75,-13 -0.25,-13.5 11.75,-13.5 12.75,-12.5 v1(13,-12.5)
  BottomLayer4 w0.15: U1.7.12 -12.205,-13.4 -12.105,-13.5 v1(-11,-13.5) ; v1(13,-12.5) TP1.7.1
NetTP2.7_1: TP2.7.1 U1.7.13 | length 27.3
  MidLayer2 w0.15: v1(-11.938,-12.6) -11.4,-12.6 -11.25,-12.75 -9,-12.75 -8,-11.75 -3.25,-11.75 -2.75,-11.25 -1,-11.25 -0.75,-11.5 -0.75,-12.25 0,-13 10,-13 v1(10.5,-12.5)
  BottomLayer4 w0.15: U1.7.13 v1(-11.938,-12.6) ; v1(10.5,-12.5) TP2.7.1
NetTP3.7_1: TP3.7.1 U1.7.7 | length 9.7
  MidLayer2 w0.15: v1(-11,-18.5) -7.494,-18.5 -6.997,-18.997 -5.978,-18.997 -5.481,-18.5 v1(-5,-18.5)
  BottomLayer4 w0.15: v1(-11,-18.5) U1.7.7 ; v1(-5,-18.5) TP3.7.1
NetTP4.7_1: TP4.7.1 U1.7.8 | length 2.5
  BottomLayer4 w0.15: TP4.7.1 -13.5,-18 -12.7,-17.2 U1.7.8
NetTP5.7_1: TP5.7.1 U1.7.20 | length 8.7
  MidLayer2 w0.15: v1(-9.4,-7.538) -9.4,-6.4 -8.965,-5.965 -8.622,-5.965 -6.965,-5.965 -6.5,-5.5 v1(-5,-5.5)
  BottomLayer4 w0.15: U1.7.20 -9.4,-7.805 v1(-9.4,-7.538) ; TP5.7.1 v1(-5,-5.5)
RESET: J1.2.3 P1.8.5 R2.7.2 TP16.1.1 | length 50.3
  TopLayer1 w0.15: P1.8.5 -14.08,-15 -11.757,-15 -11.222,-14.465 -11,-14.465 -10.535,-14 -5.5,-14 -5,-13.5 -1.5,-13.5 v1(0,-12) ; v1(17.187,2.5) 16.5,1.813 16.5,-5 17.5,-6 v1(17.5,-9)
  MidLayer2 w0.15: v1(0,-12) 2,-10 16.5,-10 v1(17.5,-9)
  BottomLayer4 w0.15: R2.7.2 v1(0,-12) ; J1.2.3 v1(17.187,2.5)
RESET_OUT: J1.3.13 TP17.1.1 U1.7.26 | length 37.9
  TopLayer1 w0.15: v1(-18,3) -17.965,2.965 -16.32,2.965 -16.035,3.25 -13.75,3.25 -13.5,3 -13.5,2.25 -13.25,2 -11.5,2 -11,1.5 -11,0.5 -11.25,0.25 -12.25,0.25 -13.5,-1 -13.5,-2.25 -13.8,-2.55 -13.8,-6.601 -9.401,-11 v1(-3.538,-11)
  BottomLayer4 w0.15: TP17.1.1 -18.5,3.5 v1(-18,3) -17.5,2.5 J1.3.13 ; U1.7.26 v1(-3.538,-11)
ROW0: D1.5.2 D1.5.3 D2.5.2 D2.5.3 D3.5.2 D3.5.3 D4.5.2 D4.5.3 R1.5.2 | length 54.5
  TopLayer1 w0.15: D3.5.3 -12.907,3.846 -12.207,3.146 D3.5.2 -11.715,2.715 -11.25,2.25 -10.75,2.25 ; D1.5.2 -8.842,-9.411 -9.542,-8.711 D1.5.3 -9.952,-8.542 -10.735,-7.76 -10.735,-5.515 v1(-11.5,-4.75) -11.5,-4.25 -11.735,-4.015 D2.5.2 -12.207,-4.457 -12.5,-4.75 -13.25,-4.75 -13.5,-4.5 -13.5,-3 -13.215,-2.715 D2.5.3 -12.907,-2.157 -12.75,-2 -10,-2 -9.75,-1.75 -9.75,0.75 -10.75,1.75 -10.75,2.25 ; D4.5.2 -8.842,8.711 -9.542,9.411 D4.5.3 -9.908,9.842 -10.035,9.715 -10.035,7.031 -9.875,6.871 -9.875,3.125 -10.75,2.25
  MidLayer2 w0.15: v1(-11.5,-4.75) -11.222,-4.472 -7.285,-4.472 -6.972,-4.785 -6.722,-5.035 -6.5,-5.035 -5.885,-5.035 -5.815,-4.965 -4.5,-4.965 -3.965,-5.5 v1(1.5,-5.5)
  BottomLayer4 w0.15: R1.5.2 1.5,-8.625 1.375,-8.5 1.375,-5.625 v1(1.5,-5.5)
ROW1: D5.5.2 D5.5.3 D6.5.2 D6.5.3 D7.5.2 D7.5.3 D8.5.2 D8.5.3 R2.5.2 | length 83.8
  TopLayer1 w0.15: D5.5.2 -3.015,12.075 -3.715,12.775 D5.5.3 -3.715,13.785 -3.5,14 -2.5,14 -1.707,13.207 1.727,13.207 2.135,12.799 ; v1(2.135,11.425) 2.135,12.799 ; D6.5.2 3.715,12.075 3.015,12.775 D6.5.3 2.543,13.207 2.135,12.799 ; D7.5.3 8.842,10.592 9,10.75 ; v1(9,11.5) 9,10.75 ; D7.5.2 10,8.542 10.25,8.792 ; D8.5.2 12.907,2.883 12.207,3.583 D8.5.3 12.207,7.443 11.108,8.542 10.5,8.542 10.25,8.792 ; v1(19,-11) v1(19,11.469) ; 9,10.75 10,10.75 10.25,10.5 10.25,8.792
  MidLayer2 w0.15: v1(2.135,11.425) 2.142,11.417 8.842,11.417 v1@8.962,11.538 ; v1(3,-11.963) 4.463,-10.5 6.55,-10.5 6.75,-10.3 7.55,-10.3 7.75,-10.5 18.5,-10.5 v1(19,-11) ; v1(9,11.5) 10,12.5 17.969,12.5 v1(19,11.469)
  BottomLayer4 w0.15: R2.5.2 3,-12.23 v1(3,-11.963)
ROW2: D9.5.2 D9.5.3 D10.5.2 D10.5.3 D11.5.2 D11.5.3 D12.5.2 D12.5.3 R3.5.2 | length 113.6
  TopLayer1 w0.15: D11.5.2 -12.15,25.282 -12.85,25.982 D11.5.3 -12.85,26.65 -12.5,27 -11,27 -10.5,26.5 -9.5,26.5 -9.15,26.15 D12.5.3 -7.85,26.85 -7.7,27 -7,27 ; D12.5.2 -6.65,24.85 -6.5,25 -6.5,26.5 -7,27 ; v1(4.5,-11.963) 5.963,-10.5 8,-10.5 8.25,-10.75 9.25,-10.75 9.542,-10.458 D10.5.2 10,-9.385 10,-8 9.75,-7.75 9.25,-7.75 9.158,-7.842 8.842,-7.842 ; D10.5.3 8.842,-7.842 ; D9.5.2 13.235,-4.015 13.5,-3.75 13.5,-2.25 13.25,-2 12.5,-2 12.207,-2.293 D9.5.3 11.785,-2.715 8.75,-5.75 8.75,-7.75 8.842,-7.842 ; v1(18.5,-12) 18,-11.5 18,-10 18.5,-9.5 18.5,8.5 18.022,8.978 18.022,22.978 12.5,28.5 -6,28.5 -6.5,28 -6.5,27.5 -7,27
  MidLayer2 w0.15: v1(4.5,-11.963) 5.243,-11.963 5.815,-12.535 7.465,-12.535 8.5,-11.5 15.965,-11.5 17,-12.535 17.965,-12.535 v1(18.5,-12)
  BottomLayer4 w0.15: R3.5.2 4.5,-12.23 v1(4.5,-11.963)
ROW3: D13.5.2 D13.5.3 D14.5.2 D14.5.3 D15.5.2 D15.5.3 D16.5.2 D16.5.3 R4.5.2 | length 84.6
  TopLayer1 w0.15: D13.5.3 -2.85,26.65 -2.5,27 -2,27 -1.5,26.5 -1.5,25 ; D13.5.2 -1.65,24.85 -1.5,25 ; D14.5.2 3.35,24.85 3.5,25 ; D15.5.2 8.35,24.85 8.5,25 ; D16.5.2 13.35,24.85 13.5,25 ; v1(17.5,-12) 17.5,-10 18.035,-9.465 18.035,6.465 17.5,7 17.5,23 16,24.5 14,24.5 13.5,25 ; -1.5,25 -1.25,24.75 -0.25,24.75 1.15,26.15 D14.5.3 2.15,26.65 2.5,27 3,27 3.5,26.5 3.5,25.5 3.5,25 ; 3.5,25 3.75,24.75 4.75,24.75 6.15,26.15 D15.5.3 7.15,26.65 7.5,27 8,27 8.5,26.5 8.5,25 ; 8.5,25 9,24.5 9.5,24.5 11.15,26.15 D16.5.3 12.15,26.65 12.5,27 13,27 13.5,26.5 13.5,25
  MidLayer2 w0.15: v1(6,-11.963) 6.478,-11.963 6.75,-12.235 7.341,-12.235 8.576,-11 16.5,-11 v1(17.5,-12)
  BottomLayer4 w0.15: R4.5.2 v1(6,-11.963)
SPI.MISO: J1.2.6 J1.3.10 P1.8.1 TP12.1.1 U1.7.16 | length 56.3
  TopLayer1 w0.15: P1.8.1 -18.25,-5.75 -18.25,-0.507 -17.208,0.535 -13.918,0.535 -13.75,0.703 -12.75,0.703 -12.453,1 v1(-11.813,1)
  MidLayer2 w0.15: v1(-11.813,1) -8.5,1 -6.75,2.75 8,2.75 10.25,0.5 11.25,0.5 11.75,1 v1(14.187,1)
  BottomLayer4 w0.15: P1.8.1@-16,-8.5 P1.8.1 -14,-8.5 -13.2,-9.3 U1.7.16 ; J1.3.10 v1(-11.813,1) ; TP12.1.1 9.5,0.5 11,0.5 11.5,1 J1.2.6 v1(14.187,1)
SPI.MOSI: J1.2.5 J1.3.11 P1.8.4 TP11.1.1 U1.7.15 | length 63.2
  TopLayer1 w0.15: P1.8.4 -16.75,-9.75 -16.75,-8.25 -18.75,-6.25 -18.75,0.931 -18.181,1.5 v1(-17.187,1.5)
  MidLayer2 w0.15: v1(-17.187,1.5) -16.187,0.5 -15,0.5 -14.965,0.535 -14,0.535 -13.715,0.535 -12.55,1.7 -8.55,1.7 -7,3.25 9.25,3.25 v1(10,2.5) 10.493,2.5 11.243,1.75 14.563,1.75 v1(14.813,1.5)
  BottomLayer4 w0.15: P1.8.4@-18.54,-11.04 P1.8.4 -16.83,-12.25 -15.25,-12.25 -14,-11 U1.7.15 ; v1(-17.187,1.5) J1.3.11 ; TP11.1.1 5.5,3.275 8.725,3.275 9.5,2.5 v1(10,2.5) ; v1(14.813,1.5) J1.2.5
SPI.SCLK: J1.2.4 J1.3.12 P1.8.3 TP13.1.1 U1.7.17 | length 68.6
  TopLayer1 w0.15: P1.8.3 -16.96,-12.5 -18.5,-12.5 -19.135,-11.865 -19.135,1.365 -18.5,2 -18,2 -17.5,2.5 v1(-14.5,2.5)
  MidLayer2 w0.15: v1(-14.5,2.5) -8.5,2.5 -7.25,3.75 10,3.75 v1(11.25,2.5)
  BottomLayer4 w0.15: P1.8.3 -16.75,-9.79 -16.75,-7.5 -16.5,-7.25 -12.088,-7.25 v1(-11.8,-7.538) U1.7.17 ; v1(-14.5,2.5) -14,2 J1.3.12 ; TP13.1.1 10.5,4.5 11.25,3.75 v1(11.25,2.5) ; v1@11.281,2.5 11.781,2 J1.2.4
VCC: C1.7.1 C2.7.1 C3.7.2 Cout.9.1 J1.2.1 J1.3.15 P1.8.2 R1.4.2 R1.7.2 R2.4.2 R3.4.2 R3.7.2 TP3.1.1 U1.7.4 U1.7.18 U1.9.2 U1.9.4 | length 131.3
  TopLayer1 w0.15: v1(-2.5,-1.5) -2.5,-2 -4,-3.5 -4,-8.5 v1(-3,-9.5) -1.5,-11 v1(-1.5,-12)
  MidLayer2 w0.5: v1(-17.187,3.5) -12.5,3.5 -11.75,4.25 -9.75,4.25 -9.5,4.5 v1(-2.5,4.5) 13.483,4.5 14.193,3.79 14.523,3.79 v1(14.813,3.5)
  BottomLayer4 w0.15: v1(-17.187,3.5) J1.3.15 ; -11,-9.858 U1.7.18 -11,-7.5 -10.65,-7.15 C2.7.1 ; C3.7.2@-10.85,-5.5 -10.65,-5.3 C3.7.2 ; -9,-12 -8,-12 -5.5,-9.5 v1(-3,-9.5) -2.85,-9.35 R1.4.2 ; -8.99,-14.99 -8.6,-15.38 U1.7.4 -8.6,-18.75 C1.7.1 ; v1(-2.5,-1.5) R2.4.2 -2.368,-3.1 -1.693,-2.425 0.575,-2.425 R3.4.2 1.35,-3 R3.7.2 ; R1.7.2 v1(-1.5,-12) ; v1(14.813,3.5) J1.2.1
  BottomLayer4 w0.4: U1.9.4 U1.9.2 -8.05,17.5 -7.5,18.05 Cout.9.1 -2.55,18.05 v1(-2.5,18) -2.5,11.5 -1,10 -1,6 v1(-2.5,4.5)
  BottomLayer4 w0.5: P1.8.2 -18.04,-7.29 -17.25,-6.5 C2.7.1 C3.7.2@-10.65,-5.3 ; C3.7.2 -10.35,-2.85 -9.5,-2 -9.5,0.5 -5.5,4.5 v1(-2.5,4.5)
  BottomLayer4 w1: -11,-9.858 -11,-9.957 -10.797,-10.16 -10.783,-10.16 -9,-11.943 -9,-12 -9,-14.98 -8.99,-14.99
VIN: Cin.9.1 P1.1.1 TP2.1.1 U1.9.3 | length 17.8
  BottomLayer4 w0.4: TP2.1.1 -16,9.5 P1.1.1 -16.5,12.5 -13.8,15.2 U1.9.3 -7.975,14.05 Cin.9.1
pads on no net: FD1.1. FD2.1. FD3.1. FD4.1. M1.1. M2.1. M3.1. M4.1. M5.1. M6.1. M7.1. M8.1. M9.1. M10.1. M11.1. M12.1. M13.1. M14.1. M15.1. M16.1. MH1.1. MH2.1. MH3.1. MH4.1. U1.4.

## Polygon pours and split planes (outlines as drawn)
GND on TopLayer1 "TopLayer1-Gnd" (solid, remove dead copper, pour order 2): -25,-25 25,-25 25,37.5 -25,37.5
GND on MidLayer2 "MidLayer2-Gnd" (solid, remove dead copper, pour order 4): -25,-25 25,-25 25,37.5 -25,37.5
GND on BottomLayer4 "BottomLayer-Gnd" (solid, remove dead copper, pour order 6): -25,-25 25,-25 25,37.5 -25,37.5
GND on Ground Plane (split plane): 19.49,-19.49 -19.49,-19.49 -19.49,29.49 19.49,29.49

## Keep-outs
Keep-Out Layer:
  the board outline again, w0.508

## Other copper
TopLayer1:
  text ".Layer_Name" at -20,-26 h1.52
  text ".Print_Date" at 7,-26 h1.52
  text ".Print_Time" at 7,-29 h1.52
MidLayer2:
  text ".Layer_Name" at -20,-26 h1.52
  text ".Print_Date" at 7,-26 h1.52
  text ".Print_Time" at 7,-29 h1.52
BottomLayer4:
  text "p0001a" at 12,19 h1.52
  text "© 2014" at 11.25,16.25 h1.52
  text ".Layer_Name" at -20,-26 h1.52
  text ".Print_Date" at 7,-26 h1.52
  text ".Print_Time" at 7,-29 h1.52
Ground Plane (plane layer: these items are gaps in the copper):
  text ".Layer_Name" at -20,-26 h1.52
  text ".Print_Date" at 7,-26 h1.52
  text ".Print_Time" at 7,-29 h1.52

## Silkscreen, mask and mechanical layers (free items; w line width, h text height)
Top Overlay:
  text ".Layer_Name" at -20,-26 h1.52
  text ".Print_Date" at 7,-26 h1.52
  text ".Print_Time" at 7,-29 h1.52
Bottom Overlay:
  text ".Layer_Name" at -20,-26 h1.52
  text ".Print_Date" at 7,-26 h1.52
  text ".Print_Time" at 7,-29 h1.52
Top Paste:
  text ".Layer_Name" at -20,-26 h1.52
  text ".Print_Date" at 7,-26 h1.52
  text ".Print_Time" at 7,-29 h1.52
Bottom Paste:
  text ".Layer_Name" at -20,-26 h1.52
  text ".Print_Date" at 7,-26 h1.52
  text ".Print_Time" at 7,-29 h1.52
Top Solder:
  text ".Layer_Name" at -20,-26 h1.52
  text ".Print_Date" at 7,-26 h1.52
  text ".Print_Time" at 7,-29 h1.52
Bottom Solder:
  text ".Layer_Name" at -20,-26 h1.52
  text ".Print_Date" at 7,-26 h1.52
  text ".Print_Time" at 7,-29 h1.52
Drill Guide:
  text ".Layer_Name" at -20,-26 h1.52
  text ".Print_Date" at 7,-26 h1.52
  text ".Print_Time" at 7,-29 h1.52
LED guide lines:
  lines w0.2: -12.557,-3.365 0,0 ; -12.557,3.365 0,0 ; -9.192,-9.192 0,0 ; -9.192,9.192 0,0 ; -3.365,12.557 0,0 ; 3.365,12.557 0,0 ; 9.192,9.192 0,0 ; 12.557,-3.365 0,0 ; 12.557,3.365 0,0 ; 0,0 9.192,-9.192 0,0
Board Outline:
  the board outline again, w0.254
  text ".Layer_Name" at -20,-26 h1.52
  text ".Print_Date" at 7,-26 h1.52
  text ".Print_Time" at 7,-29 h1.52
Assembly Outline:
  lines w0.2: -25,-32.5 -25,37.5 25,37.5 25,-32.5 -25,-32.5
Fabrication Outline:
  lines w0.2: -25,-55 -25,37.5 195,37.5 195,-55 -25,-55
Drill Drawing:
  drawing of 355 lines, arcs and shapes, not listed
  text "Symbol" at 30.286,26.813 h1.83
  text "Hit Count" at 43.135,26.813 h1.83
  text "Finished Hole Size" at 60.86,26.813 h1.83
  text "Plated" at 95.038,26.813 h1.83
  text "Hole Type" at 107.887,26.813 h1.83
  text "Physical Length" at 126.526,26.813 h1.83
  text "Rout Path Length" at 155.727,26.813 h1.83
  text "2" at 43.135,23.003 h1.52
  text "1.800mm (70.87mil)" at 60.86,23.003 h1.52
  text "NPTH" at 95.038,23.003 h1.52
  text "Slot" at 107.887,23.003 h1.52
  text "2.600mm (102.36mil)" at 126.526,23.003 h1.52
  text "0.800mm (31.50mil)" at 155.727,23.003 h1.52
  text "4" at 43.135,19.193 h1.52
  text "2.200mm (86.61mil)" at 60.86,19.193 h1.52
  text "NPTH" at 95.038,19.193 h1.52
  text "Round" at 107.887,19.193 h1.52
  text "5" at 43.135,15.383 h1.52
  text "1.000mm (39.37mil)" at 60.86,15.383 h1.52
  text "PTH" at 95.038,15.383 h1.52
  text "Round" at 107.887,15.383 h1.52
  text "8" at 43.135,11.573 h1.52
  text "0.900mm (35.43mil)" at 60.86,11.573 h1.52
  text "PTH" at 95.038,11.573 h1.52
  text "Round" at 107.887,11.573 h1.52
  text "32" at 43.135,7.763 h1.52
  text "0.610mm (24.00mil)" at 60.86,7.763 h1.52
  text "NPTH" at 95.038,7.763 h1.52
  text "Round" at 107.887,7.763 h1.52
  text "122" at 43.135,3.953 h1.52
  text "0.305mm (12.01mil)" at 60.86,3.953 h1.52
  text "PTH" at 95.038,3.953 h1.52
  text "Round" at 107.887,3.953 h1.52
  text "173 Total" at 43.135,0.143 h1.52
  text "Layer" at 29.973,-12 h1.52
  text "Name" at 40.384,-12 h1.52
  text "Material" at 64,-12 h1.52
  text "Thickness" at 85.838,-12 h1.52
  text "Constant" at 102.344,-12 h1.52
  text "Board Layer Stack" at 116.818,-12 h1.52
  text "1" at 29.973,-15.048 h1.52
  text "Top Overlay" at 40.384,-15.048 h1.52
  text "2" at 29.973,-18.096 h1.52
  text "Top Solder" at 40.384,-18.096 h1.52
  text "Solder Resist" at 64,-18.096 h1.52
  text "0.010mm" at 85.838,-18.096 h1.52
  text "3.5" at 102.344,-18.096 h1.52
  text "3" at 29.973,-21.144 h1.52
  text "TopLayer1" at 40.384,-21.144 h1.52
  text "Copper" at 64,-21.144 h1.52
  text "0.070mm" at 85.838,-21.144 h1.52
  text "4" at 29.973,-24.192 h1.52
  text "Dielectric 1" at 40.384,-24.192 h1.52
  text "FR-4" at 64,-24.192 h1.52
  text "0.120mm" at 85.838,-24.192 h1.52
  text "4.8" at 102.344,-24.192 h1.52
  text ".Layer_Name" at -20,-26 h1.52
  text ".Print_Date" at 7,-26 h1.52
  text "5" at 29.973,-27.24 h1.52
  text "MidLayer2" at 40.384,-27.24 h1.52
  text "Copper" at 64,-27.24 h1.52
  text "0.035mm" at 85.838,-27.24 h1.52
  text ".Print_Time" at 7,-29 h1.52
  text "6" at 29.973,-30.288 h1.52
  text "Dielectric 3" at 40.384,-30.288 h1.52
  text "FR-4" at 64,-30.288 h1.52
  text "1.130mm" at 85.838,-30.288 h1.52
  text "4.2" at 102.344,-30.288 h1.52
  text "7" at 29.973,-33.336 h1.52
  text "Ground Plane" at 40.384,-33.336 h1.52
  text "Copper" at 64,-33.336 h1.52
  text "0.035mm" at 85.838,-33.336 h1.52
  text "8" at 29.973,-36.384 h1.52
  text "Dielectric 4" at 40.384,-36.384 h1.52
  text "FR-4" at 64,-36.384 h1.52
  text "0.120mm" at 85.838,-36.384 h1.52
  text "4.2" at 102.344,-36.384 h1.52
  text "9" at 29.973,-39.432 h1.52
  text "BottomLayer4" at 40.384,-39.432 h1.52
  text "Copper" at 64,-39.432 h1.52
  text "0.070mm" at 85.838,-39.432 h1.52
  text "10" at 29.973,-42.48 h1.52
  text "Bottom Solder" at 40.384,-42.48 h1.52
  text "Solder Resist" at 64,-42.48 h1.52
  text "0.010mm" at 85.838,-42.48 h1.52
  text "3.5" at 102.344,-42.48 h1.52
  text "11" at 29.973,-45.528 h1.52
  text "Bottom Overlay" at 40.384,-45.528 h1.52

## Text inside footprints (layer, text, board x,y; h text height)
J1.2: Bottom Overlay "14" at 11.125,-1.875 h1.5 r90; Bottom Overlay "2" at 11.125,3.5 h1.5 r90; Bottom Overlay "15" at 18.625,-2.375 h1.5 r90; Bottom Overlay "1" at 18.625,3.75 h1.5 r90
J1.3: Bottom Overlay "1" at -18.625,-3.75 h1.5 r270; Bottom Overlay "15" at -18.625,2.375 h1.5 r270; Bottom Overlay "2" at -11.125,-3.5 h1.5 r270; Bottom Overlay "14" at -11.125,1.875 h1.5 r270
P1.8: Bottom Overlay "6" at -17.532,-15.104 h1.27 r90; Bottom Overlay "2" at -17.532,-5.96 h1.27 r90; Bottom Overlay "5" at -14.992,-15.104 h1.27 r90; Bottom Overlay "1" at -14.992,-6.468 h1.27 r90